# Altium PCB PCB_WSD.PcbDoc
Units mil, origin at the board's own origin, x right, y up, seen from the top; angles counter-clockwise.
Board outline 2190 x 3515 mil, 2 copper layers (Top Layer, Bottom Layer); 50 components, 57 nets, 210 pads, 22 vias.
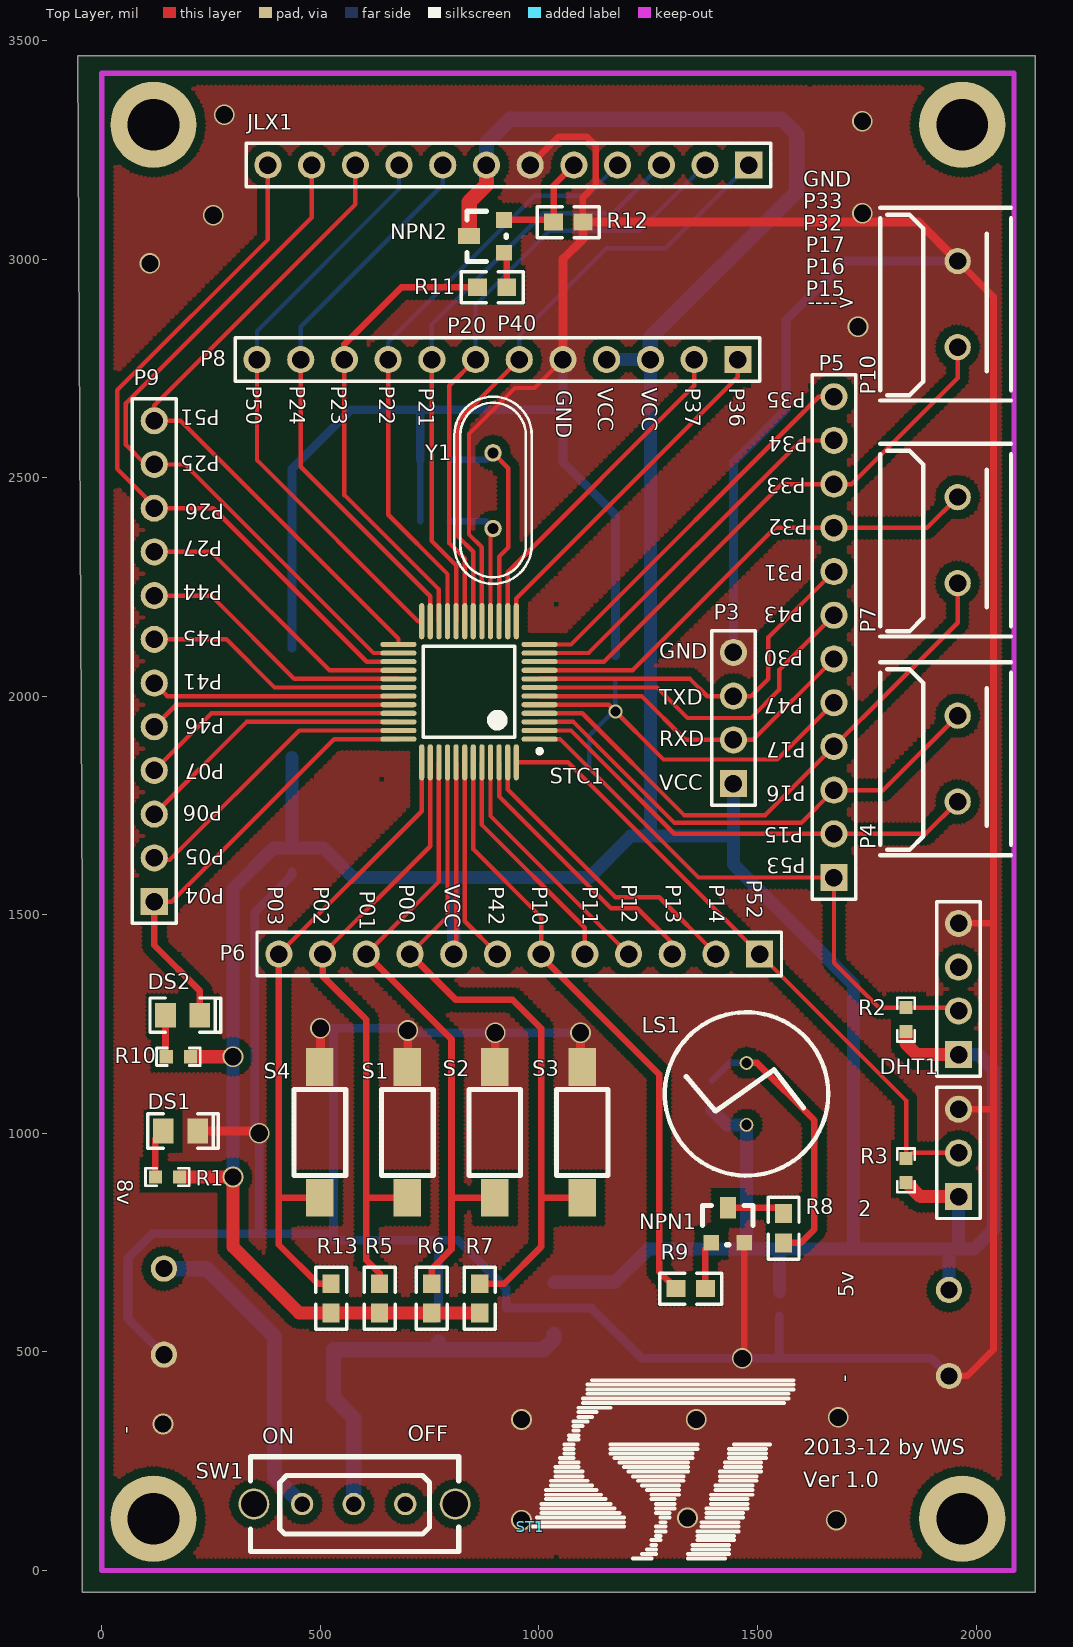
[diagram p0: Top Layer view]
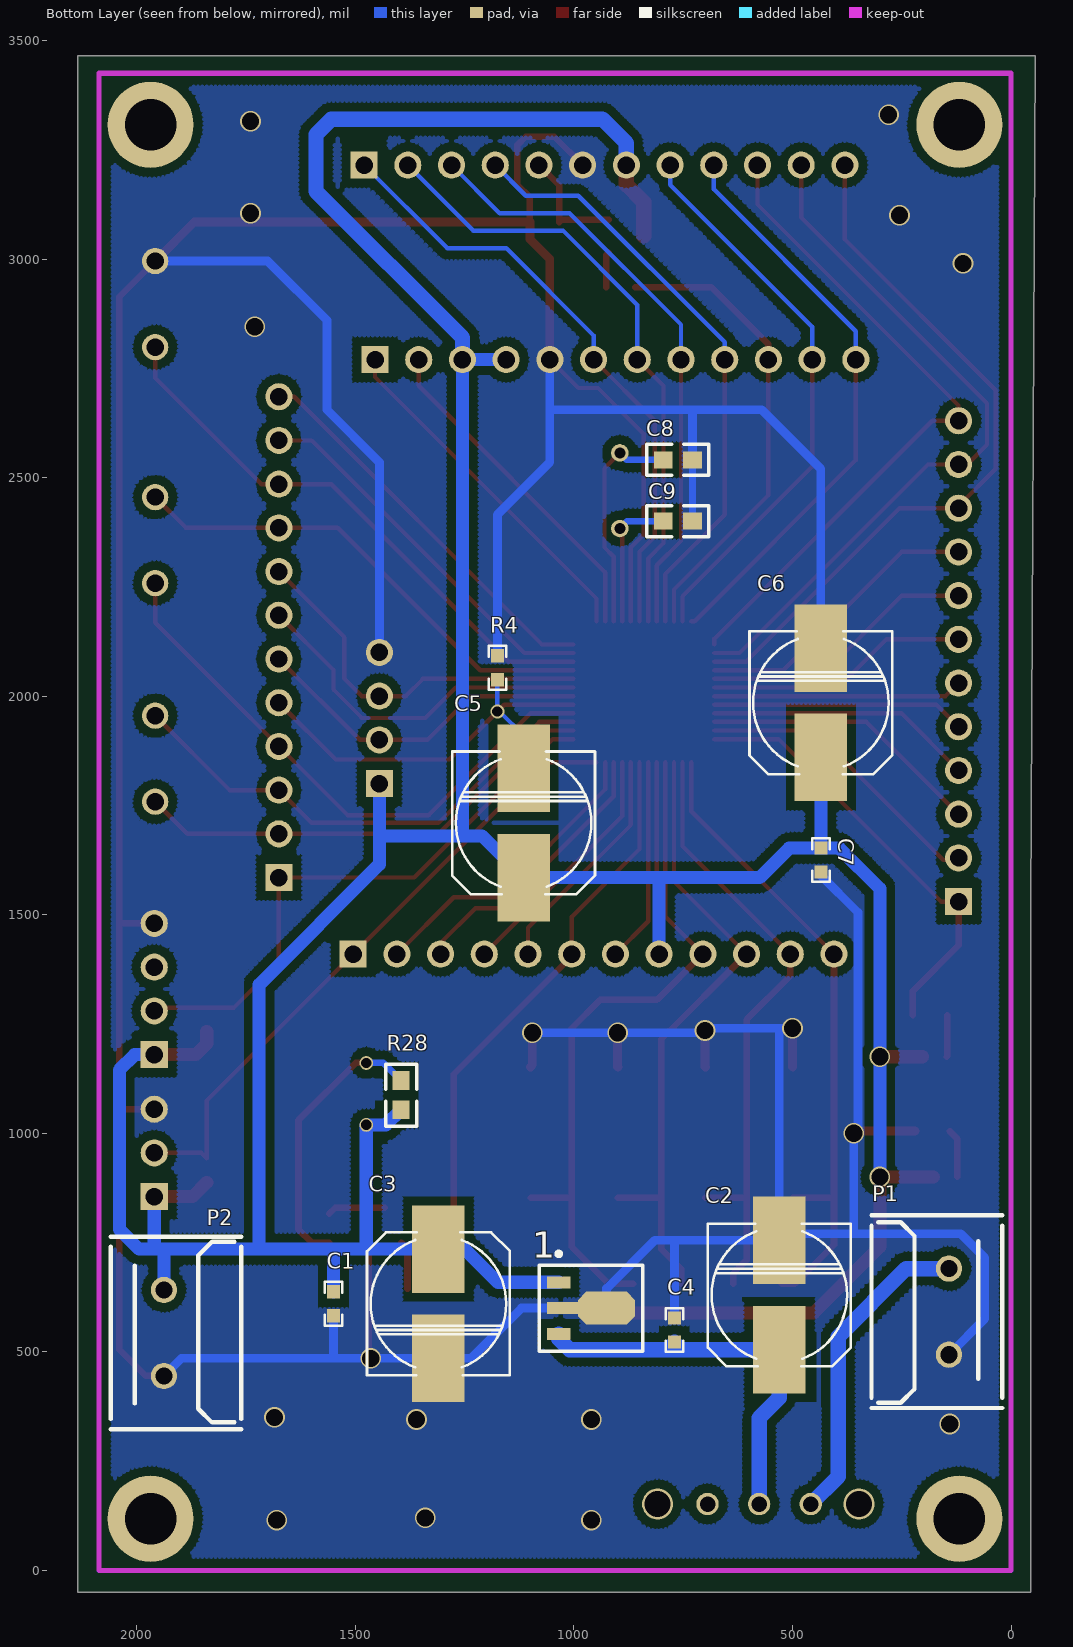
[diagram p1: Bottom Layer view, seen from below]

## Layer stack, top to bottom
Top Layer: signal copper 1.4
Dielectric: dielectric 12.6, FR-4, Dk 4.8
Bottom Layer: signal copper 1.4

## Board outline
-55,3465 2135,3465 2135,-50 -45,-50 -45,1520

## Design rules (kind name [scope] priority, off if disabled: settings)
Clearance Clearance_1 [All vs (INPolygon)] p1: gap=20
Clearance [All] p2: gap=7.87
FabricationTestPointUsage TestPointUsage [All] p1: valid=0 allowmultiple=FALSE
FabricationTestpoint Testpoint [All] p1: side=3 testpointundercomponent=TRUE minsize=40 maxsize=100 preferedsize=60 minholesize=0 maxholesize=40 preferedholesize=32 testpointgrid=1 allowsidetop=TRUE allowsidebottom=TRUE usegrid=TRUE gridtolerance=0.01
HoleSize [All] p1: absolutevalues=TRUE maxlimit=196.85 minlimit=1 maxpercent=80.000 minpercent=20.000
PolygonConnect [All] p1: connectstyle=Direct reliefconductorwidth=10 reliefentries=4 polygonreliefangle="90 Angle"
RoutingVias [All] p1: holewidth=19.68 width=31.5 viastyle="Through Hole" minholewidth=19.68 minwidth=31.5 maxholewidth=47.24 maxwidth=70.87
SilkscreenOverComponentPads [All] p1: minsilkscreentomaskgap=10
SolderMaskExpansion [All] p1: expansion=4
Width [All] p1: maxlimit=40 minlimit=7.87 preferedwidth=20 toplayer_prefwidth=15 minimp=50.000000 maximp=50.000000 favimp=50.000000
24 further rules are at their usual default settings.

## Components (designator, comment, footprint, x,y, rotation, side; value= is the part's Value field where it differs from the comment)
1 "78L05-SOT89" SOT89 980,600 r270 bottom
2 "DS18B20" HDR1X3 1960,855 r90 top
C1 "Cap" 0603 1550,610 r90 bottom
C2 "10uf" C310M 530,630 r270 bottom
C3 "10uf" C310M 1310,610 r90 bottom
C4 "Cap" 0603 770,550 r270 bottom
C5 "10uf" C310M 1115,1710 r270 bottom
C6 "10uf" C310M 435,1985 r270 bottom
C7 "104" 0603 435,1625 r90 bottom
C8 "20pF" P0603 835,2505 r180 bottom
C9 "20pF" P0603 835,2365 r180 bottom
DHT1 "DHT11" HDR1X4 1960,1180 r90 top
DS1 "LED0" LED2012 180,1005 r0 top
DS2 "LED0" LED2012 185,1270 r0 top
JLX1 "JLX12864G-086-PC" HDR1X12 1480,3215 r180 top
LS1 "Bell" BEEP 1475,1090 r90 top
NPN1 "NPN8050" SOT23-T 1375,730 r0 top
NPN2 "NPN8050" SOT23-T 940,2995 r90 top
P1 "MHDR1X2" KF301-2P 20,395 r90 bottom
P2 "MHDR1X2" KF301-2P 2060,740 r270 bottom
P3 "Header 4" HDR1X4 1445,1800 r90 top
P4 "MHDR1X2" KF301-2P 2080,1660 r90 top
P5 "Header 12" HDR1X12 1675,1585 r90 top
P6 "Header 12" HDR1X12 1505,1410 r180 top
P7 "MHDR1X2" KF301-2P 2080,2160 r90 top
P8 "Header 12" HDR1X12 1455,2770 r180 top
P9 "Header 12" HDR1X12 120,1530 r90 top
P10 "MHDR1X2" KF301-2P 2080,2700 r90 top
R1 "Res2" 0603 150,900 r0 top
R2 "Res2" 0603 1840,1260 r270 top
R3 "Res2" 0603 1840,915 r270 top
R4 "10K" 0603 1175,2065 r270 bottom
R5 "Res2" P0603 600,695 r270 top
R6 "Res2" P0603 790,549.33 r90 top
R7 "Res2" P0603 900,549.33 r90 top
R8 "100" P0603 1595,710 r90 top
R9 "10K" P0603 1420,680 r180 top
R10 "Res2" 0603 175,1175 r0 top
R11 "10K" P0603 820,2900 r0 top
R12 "1K" P0603 1140,3120 r180 top
R13 "Res2" P0603 560,549.33 r90 top
R28 "1K" P0603 1360,1014.33 r90 bottom
S1 "SW-PB" KEY-SMD 640,1120 r270 top
S2 "SW-PB" KEY-SMD 840,1120 r270 top
S3 "SW-PB" KEY-SMD 1040,1120 r270 top
S4 "SW-PB" KEY-SMD 440,1120 r270 top
ST1 "ST-WS" ST2 980,100 r0 top
STC1 "STC12C5A60S2" LQFP48_M 840,2010 r180 top
SW1 "SW-SS12D07" SS-12F44 340,260 r270 top
Y1 "12MHz" XTA 895,2470 r90 top

## Footprints (in the part's own frame and the unit in brackets; to place one, negate y for a bottom-side part, rotate by r counter-clockwise, add the part's x,y. Pads: shape width x height; smd on the part's side, far side on the other; paste and mask are expansions set on the pad)
0603 [mil]
  rect 30x30 smd: 1(-27.5,0) 2(27.5,0)
  silkscreen extent -50,-20 50,20
BEEP [mm]
  round 0.8 hole 0.6: 1(-1.8,0) 2(1.8,0)
  silkscreen extent -4.75,-4.75 4.75,4.75
C310M [mil]
  rect 200x120 smd: 1(125,0) 2(-125,0)
  silkscreen extent -163,-163 163,163
HDR1X3 [mil] "Connector; Header; 3 Position"
  rect 62x62 hole 40: 1(0,0)
  round 62 hole 40: 2(100,0) 3(200,0)
  silkscreen extent -50,-50 250,50
HDR1X4 [mil] "Connector; Header; 4 Position"
  rect 62x62 hole 40: 1(0,0)
  round 62 hole 40: 2(100,0) 3(200,0) 4(300,0)
  silkscreen extent -50,-50 350,50
HDR1X12 [mil] "Connector; Header; 12 Position"
  rect 62x62 hole 40: 1(0,0)
  round 62 hole 40: 2(100,0) 3(200,0) 4(300,0) 5(400,0) 6(500,0) 7(600,0) 8(700,0) 9(800,0) 10(900,0) 11(1000,0) 12(1100,0)
  silkscreen extent -50,-50 1150,50
KEY-SMD [mm]
  rect 2.2x1.6 smd: 1(-0.8,1.5) 2(6.8,1.5)
  silkscreen extent 0.5,0 5.5,3
KF301-2P [mm]
  round 1.524 hole 1: 1(2.5,3.1) 2(7.5,3.1)
  silkscreen extent -0.6,0 10.6,7.6
LED2012 [mm] "SMD LED 2mm x 1.2 mm"
  rect 1.2x1.45 smd: 1(-1,0) 2(1,0)
  silkscreen extent -1.9,-1 2.2,1
LQFP48_M [mm]
  oval 2.1x0.3 smd: 1(-4.1,2.75) 2(-4.1,2.25) 3(-4.1,1.75) 4(-4.1,1.25) 5(-4.1,0.75) 6(-4.1,0.25) 7(-4.1,-0.25) 8(-4.1,-0.75) 9(-4.1,-1.25) 10(-4.1,-1.75) 11(-4.1,-2.25) 12(-4.1,-2.75) 25(4.1,-2.75) 26(4.1,-2.25) 27(4.1,-1.75) 28(4.1,-1.25) 29(4.1,-0.75) 30(4.1,-0.25) 31(4.1,0.25) 32(4.1,0.75) 33(4.1,1.25) 34(4.1,1.75) 35(4.1,2.25) 36(4.1,2.75)
  oval 0.3x2.1 smd: 13(-2.75,-4.1) 14(-2.25,-4.1) 15(-1.75,-4.1) 16(-1.25,-4.1) 17(-0.75,-4.1) 18(-0.25,-4.1) 19(0.25,-4.1) 20(0.75,-4.1) 21(1.25,-4.1) 22(1.75,-4.1) 23(2.25,-4.1) 24(2.75,-4.1) 37(2.75,4.1) 38(2.25,4.1) 39(1.75,4.1) 40(1.25,4.1) 41(0.75,4.1) 42(0.25,4.1) 43(-0.25,4.1) 44(-0.75,4.1) 45(-1.25,4.1) 46(-1.75,4.1) 47(-2.25,4.1) 48(-2.75,4.1)
  silkscreen extent -4.23,-2.65 2.65,3.57
P0603 [mm]
  rect 1.1x1 smd: 1(1,0.9) 2(2.7,0.9)
  silkscreen extent 0.05,0 3.65,1.8
SOT23-T [mil]
  rect 36x36 smd: 1(19.49,19.69) 2(94.49,19.69)
  rect 36x50 smd: 3(57.49,99.69)
  silkscreen extent -1,15 114,105
SOT89 [mm] "SOT-89; Body 4.6 x 4.25 mm, inc. leads (LxW max)"
  oct 1.9x3.3 smd: 0(0,1.388)
  rect 0.7x1.35 smd: 1(-1.5,-1.388) 3(1.5,-1.388)
  rect 0.7x1.8 smd: 2(0,-1.162)
  silkscreen extent -3.27,-2.51 2.5,3.49
SS-12F44 [mm]
  round 1.8 hole 1.5: 0(2.75,11.9) 0(2.75,0.2)
  round 1.3 hole 0.9: 1(2.75,3) 2(2.75,6) 3(2.75,9)
  silkscreen extent 0,0 5.5,12.1
ST2 [mil]
  silkscreen extent 5,-73 602,335
XTA [mil]
  round 40 hole 25: 1(86.61,0) 2(-86.61,0)
  silkscreen extent -213,-89 215,89

## Part data
C1 C4: "Capacitor"
C2 C3 C5 C6: library part "Cap Pol3", "Polarized Capacitor (Surface Mount)"
C7 C8 C9: library part Cap, "Capacitor"
DS1 DS2: "Typical INFRARED GaAs LED"
LS1: "Electrical Bell"
P1 P2 P4 P7 P10: "Header, 2-Pin"
P3: "Header, 4-Pin"
P5 P6 P8 P9: "Header, 12-Pin"
R1 R2 R3 R5 R6 R7 R10 R13: "Resistor"
R4 R8 R9 R11 R12 R28: library part Res2, "Resistor"
S1 S2 S3 S4: "Switch"
Y1: library part XTAL, "Crystal Oscillator"

## Free pads (board coordinates)
  round 196.85 hole 118.11: 0(118.11,118.11) 0(118.11,3307.09) 0(1968.5,118.11) 0(1968.5,3307.09)

## Via types
v1: diameter 47.24, hole 39.37, Top Layer to Bottom Layer, 21 vias
v2: diameter 31.5, hole 23.62, Top Layer to Bottom Layer, 1 vias

## Nets (pads, with @x,y where several pads share a name; then routed paths per layer and width w, separated by ;. In a path a pad name is that pad's centre, name@x,y a point inside that pad or via, vN(x,y) a via of type N, cw(c..) or ccw(c..) an arc to the next point about the centre after c; other vN are vias at no path point)
5V: 1.1 2.1 C1.2 C3.1 C5.1 C6.1 C7.2 DHT1.1 JLX1.7 LS1.1 NPN2.3 P2.1 P3.1 P6.8 P8.3 P8.4 R1.2 R2.2 R3.2 R5.2 R6.1 R7.1 R10.2 R13.1 R28.1 STC1.41 | length 10242.3
  Top Layer w10: P6.8 810.47,1415.47 STC1.41
  Top Layer w30: R1.2 v1(300,900) 300,740 451.3,588.7 R13.1 R6.1 R7.1 ; R10.2 v1(300,1175) ; R3.2 1872.5,855 2.1 ; R2.2 1840,1205 1865,1180 DHT1.1
  Top Layer w35: NPN2.3 840.32,3130.31 880,3170 JLX1.7
  Bottom Layer w30: v1(300,900) 300,1560 392.5,1652.5 507.5,1652.5 575,1585 C5.1 1210,1680 1255,1680 ; C7.2 C6.1 ; P6.8 805,1585 ; 1.1 1174.06,659.06 1250,735 C3.1 1475,735 ; P8.4 P8.3 1255,1680 ; R28.1 1430,1019.13 LS1.1 1475,735 ; P3.1 1445,1680 ; C1.2 1550,735 ; P2.1@1933.88,637.5 P2.1 1937.95,732.05 1935,735 ; 2.1 1960,735 ; DHT1.1 2005,1180 2040,1145 2040,780 1995,735 1960,735 ; 1255,1680 1445,1680 ; 1445,1680 1445,1615 1720,1340 1720,735 ; 1475,735 1550,735 ; 1550,735 1720,735 ; 1720,735 1935,735 ; 1935,735 1960,735
  Bottom Layer w35: JLX1.7 880,3265 935,3320 1555,3320 1590,3285 1590,3155 1255,2820 P8.3
8V: P1.2 SW1.1 | length 726.7
  Bottom Layer w35: P1.2 239.72,690.28 395,535 395,214.84 SW1.1
18B20: 2.2 P6.1 R3.1 STC1.48 | length 1469.8
  Top Layer w10: STC1.48 1066.42,1848.58 1840,1075 R3.1 1852.5,955 2.2
BEEP: P6.6 R9.2 STC1.43 | length 1601.2
  Top Layer w10: STC1.43 849.84,1650.16 1005,1495 P6.6
  Top Layer w15: P6.6 1005,1405 1275,1135 1275,930 ; 1275,725 1275,930 ; R9.2 1275,683.27 1275,930
DHT: DHT1.2 P5.1 R2.1 STC1.1 | length 1330.3
  Top Layer w10: STC1.1 1048.27,1901.73 1365,1585 P5.1 1675,1390 1777.5,1287.5 R2.1 1952.5,1287.5 DHT1.2
DS-IO: P9.8 STC1.29 | length 637.5
  Top Layer w10: P9.8 250,2230 440.47,2039.53 STC1.29
DS-R\S\T\: P9.9 STC1.28 | length 670.7
  Top Layer w10: P9.9 250,2330 520.79,2059.21 STC1.28
DS-SCK: P9.7 STC1.30 | length 604.2
  Top Layer w10: P9.7 285,2130 395.16,2019.84 STC1.30
GND: 1.0 1.2 2.3 C1.1 C2.2 C3.2 C4.1 C6.2 C7.1 C8.2 C9.2 DHT1.4 DS1.2 JLX1.6 NPN1.2 P1.1 P2.2 P3.4 P8.5 P10.2 R4.1 R12.1 S1.1 S2.1 S3.1 S4.1 STC1.17 | length 13757
  Top Layer w10: STC1.17 869.53,2340.47 840,2370 840,2600 945,2705 990,2705 P8.5
  Top Layer w15: JLX1.6 1045,3280 1110,3280 1130,3260 1130,3170 1100.63,3140.63 R12.1 ; v1(1465,485) 1460.63,489.37 1469.49,498.23 NPN1.2 ; P2.2 1979.72,444.72 2040,505 2040,2913.23 P10.2 ; 2.3 2040,1055 ; DHT1.4 2040,1480
  Top Layer w20: DS1.2 355,1005 v1(360,1000) ; S4.1 500,1152.44 v1(500,1240) ; S1.1 700,1152.44 v1(700,1235) ; S2.1 900,1152.44 v1(900,1230) ; P8.5 1055,3000 1100.63,3045.63 R12.1 1868.66,3084.57 P10.2 ; v1(1095,1230) 1095,1155.55 S3.1
  Bottom Layer w15: C9.2 C8.2
  Bottom Layer w20: P1.1 60,575.47 60,715 115,770 515,770 C2.2 ; 360,770 v1(360,1000) 350,1010 350,1505 435,1590 C7.1 ; C6.2 435,2520 570,2655 1055,2655 ; v1(500,1240) 695,1240 705,1230 v1(1095,1230) ; 535,1240 530,1235 C2.2 ; C8.2 728.7,2648.7 735,2655 ; C4.1 770,755 ; P8.5 1055,2535 1175,2415 R4.1 ; P3.4 1445,2535 1565,2655 1565,2860 1700.28,2995.28 P10.2 ; C1.1 1550,485 ; P2.2 1897.68,485 1550,485 ; C2.2 815,755 925.37,644.63 1.0 1.2 1120,600 1235,485 C3.2 v1(1465,485) 1550,485
  other v1: 960,115 1680,115 1340,120 140,335 960,345 1360,345 1685,350 1730,2845 110,2990 255,3100 1740,3105 1740,3315 280,3330
KEY-C: P6.12 R13.2 S4.2 STC1.37 | length 1487.3
  Top Layer w10: P6.12 731.73,1736.73 STC1.37
  Top Layer w15: P6.12 405,745 494.37,655.63 R13.2 ; 407.28,852.28 S4.2
KEY-DOWN: P6.9 R7.2 S3.2 STC1.40 | length 1611.7
  Top Layer w10: P6.9 790.79,1495.79 STC1.40
  Top Layer w15: P6.9 810,1305 940,1305 1005,1240 1005,740 920.63,655.63 R7.2 ; 1007.28,852.28 S3.2
KEY-OK: P6.10 R6.2 S2.2 STC1.39 | length 1461.3
  Top Layer w10: P6.10 771.1,1576.1 STC1.39
  Top Layer w15: P6.10 800,1215 800,735 754.57,689.57 R6.2 ; 800,850 802.28,852.28 S2.2
KEY-UP: P6.11 R5.1 S1.2 STC1.38 | length 1444.1
  Top Layer w10: P6.11 751.42,1656.42 STC1.38
  Top Layer w15: P6.11 505,1360 605,1260 605,710 635.43,679.57 R5.1 ; 605,850 607.28,852.28 S1.2
LCD-CS: JLX1.12 P9.10 STC1.27 | length 1667.1
  Top Layer w10: JLX1.12 380,3045 35,2700 35,2520 120,2435 P9.10 255,2430 606.1,2078.9 STC1.27
LCD-LED: P8.10 R11.1 STC1.22 | length 1081.5
  Top Layer w10: P8.10 555,2460 771.1,2243.9 STC1.22
  Top Layer w15: P8.10 555,2805 685.43,2935.43 R11.1
LCD-REST: JLX1.11 P9.11 STC1.26 | length 1637
  Top Layer w10: JLX1.11 480,3095 55,2670 55,2575 100,2530 190,2530 621.42,2098.58 STC1.26
LCD-RS: JLX1.10 P9.12 STC1.25 | length 1553.8
  Top Layer w10: JLX1.10 580,3125 120,2665 P9.12 180,2630 678.58,2131.42 STC1.25
LCD-SCLK: JLX1.8 P8.11 STC1.23 | length 1301
  Top Layer w10: P8.11 455,2525 751.42,2228.58 STC1.23
  Bottom Layer w10: P8.11 455,2845 780,3170 JLX1.8
LCD-SDA: JLX1.9 P8.12 STC1.24 | length 1339
  Top Layer w10: P8.12 355,2540 723.58,2171.42 STC1.24
  Bottom Layer w10: P8.12 355,2835 680,3160 JLX1.9
LED: DS2.2 P9.1 STC1.36 | length 1015.8
  Top Layer w10: P9.1 160,1530 531.73,1901.73 STC1.36
  Top Layer w15: P9.1 120,1430 224.37,1325.63 DS2.2
Net1_3: 1.3 C2.1 C4.2 SW1.2 | length 916.1
  Bottom Layer w35: SW1.2 576.22,348.78 530,395 C2.1 1010,505 1034.63,529.63 1.3 ; 770,505 C4.2
NetC8_1: C8.1 STC1.15 Y1.1 | length 514.5
  Top Layer w10: Y1.1 930,2521.61 930,2340 908.9,2318.9 STC1.15
  Bottom Layer w15: C8.1 878.82,2540.43 Y1.1
NetC9_1: C9.1 STC1.16 Y1.2 | length 320.8
  Top Layer w10: STC1.16 889.21,2377.6 Y1.2
  Bottom Layer w15: C9.1 877.95,2400.43 Y1.2
NetDS1_1: DS1.1 R1.1 | length 112.5
  Top Layer w15: R1.1 122.5,986.87 DS1.1
NetDS2_1: DS2.1 R10.1 | length 95.8
  Top Layer w15: DS2.1 145.63,1176.87 R10.1
NetJLX1_5: JLX1.5 NPN2.2 R12.2 | length 265
  Top Layer w15: NPN2.2 1028.78,3089.49 R12.2 1033.7,3168.7 JLX1.5
NetLS1_2: LS1.2 R8.1 R28.2 | length 638.6
  Top Layer w15: LS1.2 1499.13,1160.87 1630,1030 1630,780 1599.37,749.37 R8.1
  Bottom Layer w15: R28.2 1435.67,1160.87 LS1.2
NetNPN1_1: NPN1.1 R9.1 | length 110.9
  Top Layer w15: R9.1 1380.63,735.83 NPN1.1
NetNPN1_3: NPN1.3 R8.2 | length 132.6
  Top Layer w15: NPN1.3 1546.18,829.69 R8.2
NetNPN2_1: NPN2.1 R11.2 | length 81.5
  Top Layer w15: NPN2.1 926.3,3008.5 R11.2
P4.0: JLX1.1 P8.6 STC1.18 | length 1412.5
  Top Layer w10: STC1.18 849.84,2330.16 815,2365 815,2630 P8.6
  Bottom Layer w10: P8.6 955,2825 1155,3025 1290,3025 JLX1.1
P05: P9.2 STC1.35 | length 683.4
  Top Layer w10: P9.2 125,1625 155,1625 451.42,1921.42 STC1.35
P06: P9.3 STC1.34 | length 646
  Top Layer w10: P9.3 331.1,1941.1 STC1.34
P07: P9.4 STC1.33 | length 612.8
  Top Layer w10: P9.4 250.79,1960.79 STC1.33
P11: P6.5 STC1.44 | length 536.1
  Top Layer w10: STC1.44 869.53,1705.47 1105,1470 P6.5
P12: P6.4 STC1.45 | length 569.4
  Top Layer w10: STC1.45 889.21,1725.79 P6.4
P13: P6.3 STC1.46 | length 637.8
  Top Layer w10: STC1.46 908.9,1771.1 1165,1515 1225,1515 1305,1435 P6.3
P14: P6.2 STC1.47 | length 694.5
  Top Layer w10: STC1.47 928.58,1786.42 1175,1540 1275,1540 P6.2
P15: P4.1 P5.2 STC1.2 | length 1084.9
  Top Layer w10: STC1.2 1073.31,1921.42 1309.72,1685 1884.53,1685 P4.1
P16: P4.2 P5.3 STC1.3 | length 1153.9
  Top Layer w10: STC1.3 1078.9,1941.1 1310,1710 1600,1710 P5.3 1787.68,1785 P4.2
P17: P5.4 P7.1 STC1.4 | length 1325.8
  Top Layer w10: STC1.4 1099.21,1960.79 1332.13,1727.87 1517.87,1727.87 1957.95,2167.95 P7.1
P20: JLX1.2 P8.7 STC1.19 | length 1420.5
  Top Layer w10: STC1.19 830.16,2315 795,2350.16 795,2710 P8.7
  Bottom Layer w10: P8.7 855,2895 1025,3065 1230,3065 JLX1.2
P21: JLX1.3 P8.8 STC1.20 | length 1377.7
  Top Layer w10: P8.8 755,2355 810.47,2299.53 STC1.20
  Bottom Layer w10: P8.8 755,2850 1010,3105 1170,3105 JLX1.3
P22: JLX1.4 P8.9 STC1.21 | length 1387.6
  Top Layer w10: P8.9 655,2415 790.79,2279.21 STC1.21
  Bottom Layer w10: P8.9 655,2810 990,3145 1110,3145 JLX1.4
P30: P3.2 P5.6 STC1.6 | length 791.7
  Top Layer w10: STC1.6 1234.84,2000.16 1335,1900 1490,1900 P5.6
P31: P3.3 P5.8 STC1.8 | length 863.7
  Top Layer w10: STC1.8 1345.47,2039.53 1385,2000 1485,2000 1525,2040 1525,2135 P5.8
P32: P5.9 P7.2 STC1.9 | length 1120.6
  Top Layer w10: STC1.9 1214.21,2059.21 1540,2385 1887.68,2385 P7.2
P33: P5.10 P10.1 STC1.10 | length 1295.9
  Top Layer w10: STC1.10 1148.9,2078.9 1555,2485 1715,2485 1957.95,2727.95 P10.1
P34: P5.11 STC1.11 | length 875.1
  Top Layer w10: STC1.11 1113.58,2098.58 1600,2585 P5.11
P35: P5.12 STC1.12 | length 908.3
  Top Layer w10: STC1.12 1073.27,2118.27 1640,2685 P5.12
P36: P8.1 STC1.13 | length 808.5
  Top Layer w10: STC1.13 948.27,2223.27 1455,2730 P8.1
P37: P8.2 STC1.14 | length 775.2
  Top Layer w10: STC1.14 928.58,2283.58 1355,2710 P8.2
P41: P9.6 STC1.31 | length 570.9
  Top Layer w10: P9.6 149.84,2000.16 STC1.31
P42: P6.7 STC1.42 | length 469.6
  Top Layer w10: STC1.42 830.16,1484.84 P6.7
P43: P5.7 STC1.7 | length 826.2
  Top Layer w10: STC1.7 1270.16,2019.84 1340,1950 1485,1950 1550,2015 1550,2060 P5.7
P46: P9.5 STC1.32 | length 579.5
  Top Layer w10: P9.5 170.47,1980.47 STC1.32
P47: C5.2 P5.5 R4.2 STC1.5 | length 1009.7
  Top Layer w10: STC1.5 1159.53,1980.47 1285,1855 1545,1855 P5.5
  Bottom Layer w10: C5.2 1115,1910 1170,1965 v2(1175,1965) R4.2
pads on no net: DHT1.3 SW1.0 SW1.3

## Polygon pours and split planes (outlines as drawn)
GND on Bottom Layer "Top Layer-No Net" (hatched 90Degree grid 10 track 10, remove dead copper): 2075,15 10,15 10,3410 2075,3410
GND on Top Layer "Top Layer-No Net" (hatched 90Degree grid 10 track 10, remove dead copper): 2065,15 20,15 15,20 15,3410 2070,3410 2075,3405

## Keep-outs
Keep-Out Layer:
  lines w11.81: 0,0 2086.61,0 2086.61,3425.2 0,3425.2 0,0

## Silkscreen, mask and mechanical layers (free items; w line width, h text height)
Top Overlay:
  text "GND" at 1605,3165 h35
  text "P33" at 1605,3115 h35
  text "P32" at 1605,3065 h35
  text "P17" at 1610,3015 h35
  text "P16" at 1610,2965 h35
  text "P15" at 1610,2915 h35
  text "---->" at 1615,2885 h35
  text "P40" at 905,2835 h35
  text "P20" at 790,2830 h35
  text "P50" at 330,2710 h35 r270
  text "P24" at 430,2710 h35 r270
  text "P23" at 525,2710 h35 r270
  text "P22" at 635,2710 h35 r270
  text "P21" at 725,2705 h35 r270
  text "VCC" at 1135,2705 h35 r270
  text "VCC" at 1235,2705 h35 r270
  text "P37" at 1335,2705 h35 r270
  text "P36" at 1435,2705 h35 r270
  text "GND" at 1040,2700 h35 r270
  text "P35" at 1610,2695 h35 r180
  text "P51" at 270,2655 h35 r180
  text "P34" at 1615,2595 h35 r180
  text "P25" at 270,2550 h35 r180
  text "P33" at 1610,2500 h35 r180
  text "P26" at 280,2440 h35 r180
  text "P32" at 1615,2405 h35 r180
  text "P27" at 275,2355 h35 r180
  text "P31" at 1605,2300 h35 r180
  text "P44" at 275,2255 h35 r180
  text "P43" at 1605,2205 h35 r180
  text "P45" at 275,2150 h35 r180
  text "P30" at 1605,2105 h35 r180
  text "GND" at 1275,2085 h35
  text "P41" at 275,2050 h35 r180
  text "P47" at 1605,1995 h35 r180
  text "TXD" at 1275,1980 h35
  text "P46" at 280,1950 h35 r180
  text "P17" at 1610,1895 h35 r180
  text "RXD" at 1275,1885 h35
  text "P07" at 280,1845 h35 r180
  text "P16" at 1610,1795 h35 r180
  text "VCC" at 1275,1785 h35
  text "P06" at 275,1750 h35 r180
  text "P15" at 1605,1700 h35 r180
  text "P05" at 280,1650 h35 r180
  text "P53" at 1610,1630 h35 r180
  text "P52" at 1475,1580 h35 r270
  text "P00" at 680,1570 h35 r270
  text "VCC" at 785,1570 h35 r270
  text "P12" at 1190,1570 h35 r270
  text "P13" at 1290,1570 h35 r270
  text "P14" at 1390,1570 h35 r270
  text "P03" at 380,1565 h35 r270
  text "P02" at 485,1565 h35 r270
  text "P42" at 885,1565 h35 r270
  text "P10" at 985,1565 h35 r270
  text "P11" at 1100,1565 h35 r270
  text "P04" at 280,1560 h35 r180
  text "P01" at 590,1555 h35 r270
  text "8v" at 35,895 h35 r270
  text "5v" at 1720,625 h35 r90
  text "-" at 1715,430 h35 r90
  text "-" at 45,330 h35 r270
  text "OFF" at 700,295 h35
  text "ON" at 367.5,290 h35
  text "2013-12 by WS" at 1605,265 h35
  text "Ver 1.0" at 1605,190 h35
Drill Drawing:
  text ".LEGEND" at 4189.37,-160 h35
  text "Drill Drawing." at 4189.37,-260 h35

## Dimensions
0,0 to 2086.61,0 on Mechanical 1
0,0 to 0,3425.2 on Mechanical 1